# EAGLE board Power-Supply (EAGLE 9.6.2)
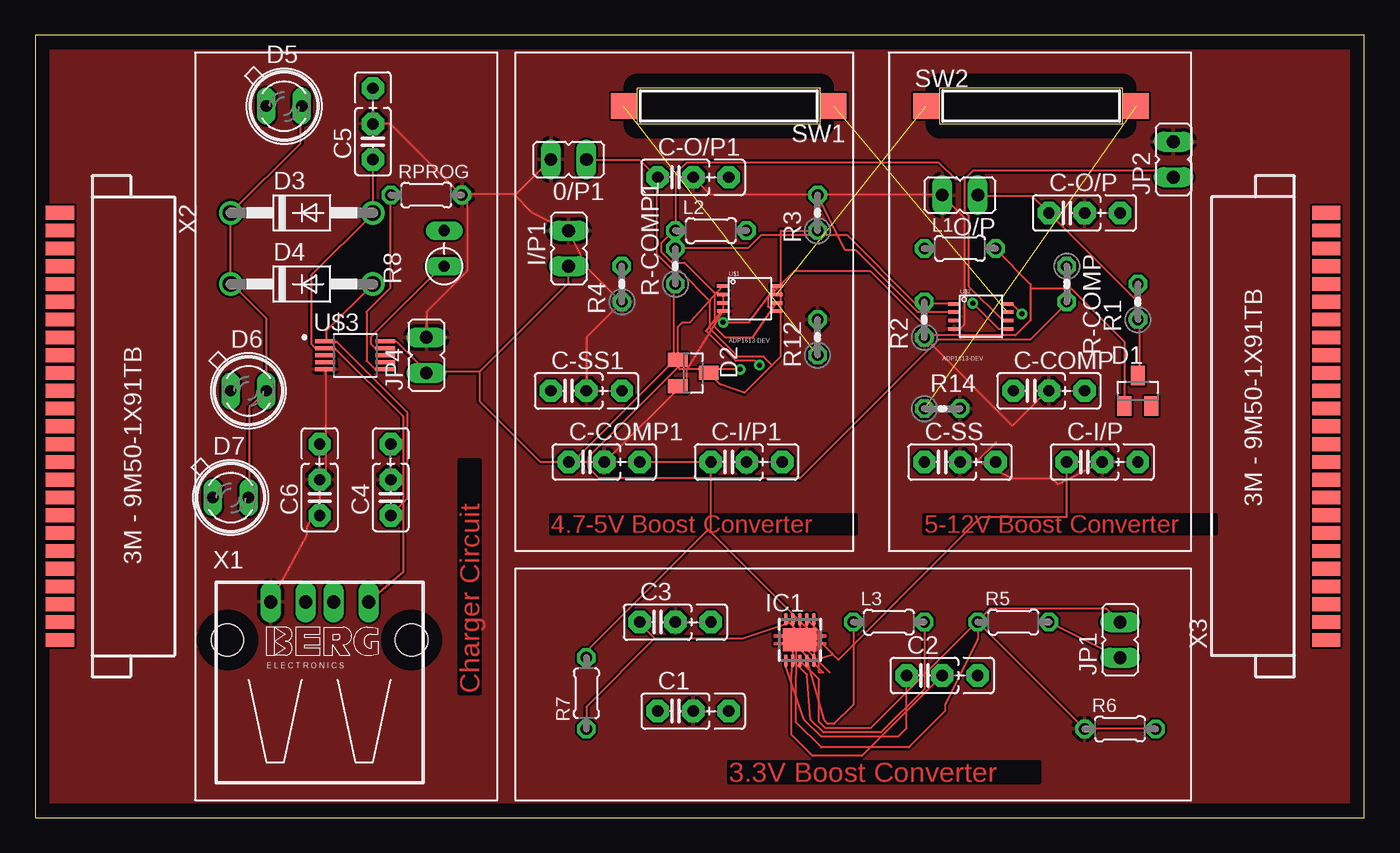
[diagram p0: board, top side]
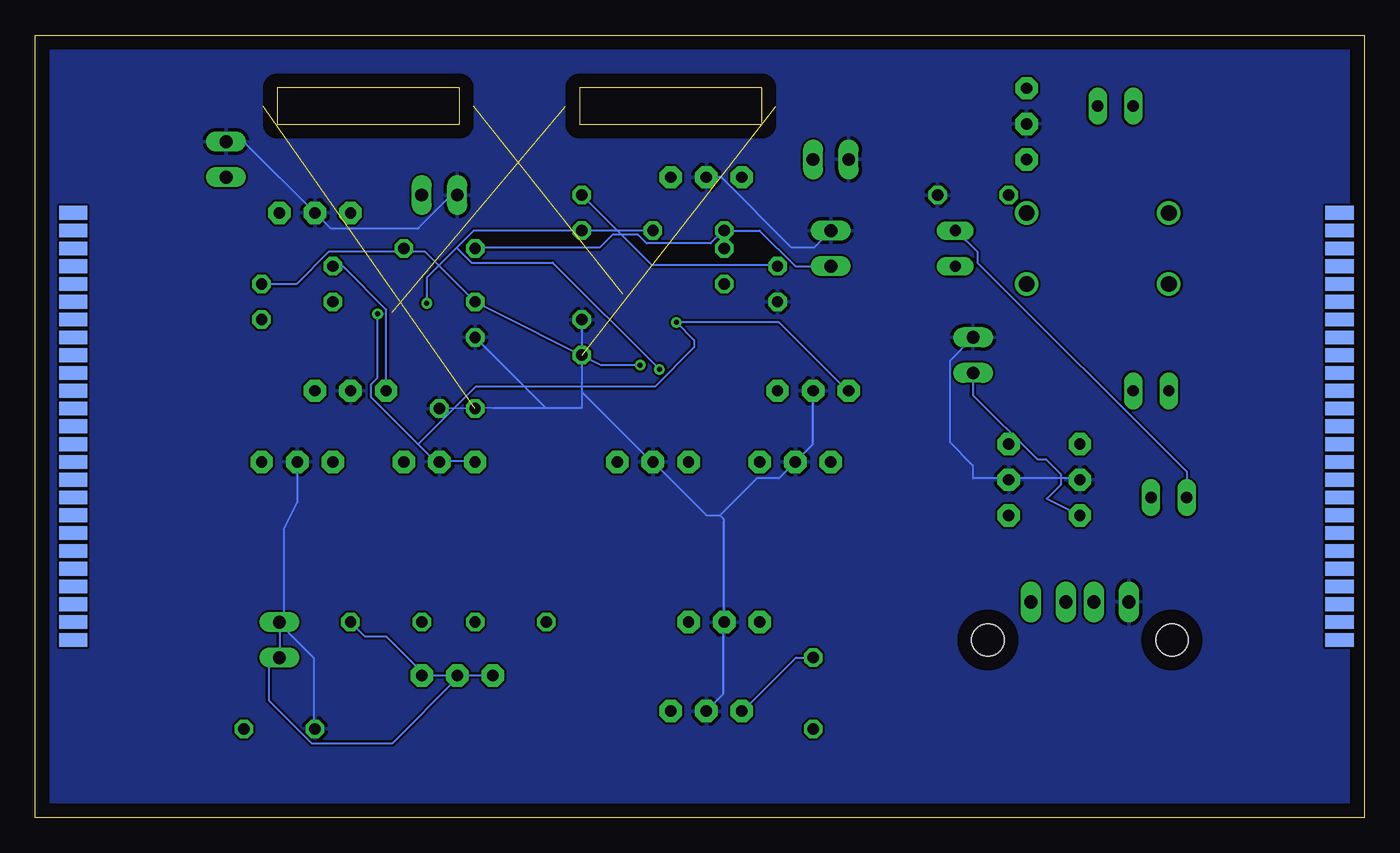
[diagram p1: board, bottom side, seen from below]

Size 94.92 x 55.87 mm. Coordinates in mm from the lower left corner, seen from the top.
Outline: 0,0 94.92,0 94.92,55.87 0,55.87 0,0
Copper layers (1*16): Top 0.035mm / dielectric 1.5mm / Bottom 0.035mm
Design rules "default": minimum track width 6mil, minimum drill 0.35mm, track to track 6mil, track to pad 6mil, pad to pad 6mil, via to via 6mil, smd to smd 6mil, copper to edge 40mil, drill to drill 6mil, minimum pad ring 10mil, minimum via ring 8mil, stop-mask expansion 4mil, vias tented up to drill 0mil, thermal gap 10mil

## Footprints (pad centres in the part's own frame; a part is rotated, then mirrored left to right if it is on the bottom)
JP1 = drill 0.914 long: 1 0,-1.27; 2 0,1.27
C2.5/5-2 = drill 0.813 pad 1.6 octagon: 1 -1.27,0; 2 1.27,0; 3 3.81,0
SOT23 = smd 1 x 1.4: 1 -0.95,-1.1; 2 0.95,-1.1; 3 0,1.1
DO41-10 = drill 1.118: A 5.08,0; C -5.08,0
SFH482 = drill 0.813 long: A -1.27,0; K 1.27,0
DRC-S-PVSON-N10 = smd 0.28 x 0.85: 1 -1,-1.475; 2 -0.5,-1.475; 3 0,-1.475; 4 0.5,-1.475; 5 1,-1.475; 6 1,1.475; 7 0.5,1.475; 8 0,1.475; 9 -0.5,1.475; 10 -1,1.475 | smd 2.4 x 1.65: TH 0,0
0204/5 = drill 0.813 octagon: 1 -2.54,0; 2 2.54,0
0204V = drill 0.813 octagon: 1 -1.27,0; 2 1.27,0
RS-2,5 = drill 0.813 long: 1 -1.27,0; 2 1.27,0
CT10-XXXX-A2 = smd 1.8 x 1.8: 1 -7.5,0; 2 7.5,0
ADP1613-FOOTPRINT = smd 0.85 x 0.25: P$1 -0.4,2.4; P$2 -0.4,1.8; P$3 -0.4,1.2; P$4 -0.4,0.6; P$5 3.4,0.6; P$6 3.4,1.2; P$7 3.4,1.8; P$8 3.4,2.4
SOP50P490X110-10N = smd 1.47 x 0.28: 1 -2.15,1; 2 -2.15,0.5; 3 -2.15,0; 4 -2.15,-0.5; 5 -2.15,-1; 6 2.15,-1; 7 2.15,-0.5; 8 2.15,0; 9 2.15,0.5; 10 2.15,1
PN87520 = drill 0.95 long: 1 -3.5,2.71; 2 -1,2.71; 3 1,2.71; 4 3.5,2.71 | hole 2.3: -6.57,0; 6.57,0
9M501X91 = smd 0.98 x 2.03: 1 -15.24,-3.29; 2 -13.97,-3.29; 3 -12.7,-3.29; 4 -11.43,-3.29; 5 -10.16,-3.29; 6 -8.89,-3.29; 7 -7.62,-3.29; 8 -6.35,-3.29; 9 -5.08,-3.29; 10 -3.81,-3.29; 11 -2.54,-3.29; 12 -1.27,-3.29; 13 0,-3.29; 14 1.27,-3.29; 15 2.54,-3.29; 16 3.81,-3.29; 17 5.08,-3.29; 18 6.35,-3.29; 19 7.62,-3.29; 20 8.89,-3.29; 21 10.16,-3.29; 22 11.43,-3.29; 23 12.7,-3.29; 24 13.97,-3.29; 25 15.24,-3.29 | smd 0.98 x 2.03 bottom: 26 -15.24,-3.29; 27 -13.97,-3.29; 28 -12.7,-3.29; 29 -11.43,-3.29; 30 -10.16,-3.29; 31 -8.89,-3.29; 32 -7.62,-3.29; 33 -6.35,-3.29; 34 -5.08,-3.29; 35 -3.81,-3.29; 36 -2.54,-3.29; 37 -1.27,-3.29; 38 0,-3.29; 39 1.27,-3.29; 40 2.54,-3.29; 41 3.81,-3.29; 42 5.08,-3.29; 43 6.35,-3.29; 44 7.62,-3.29; 45 8.89,-3.29; 46 10.16,-3.29; 47 11.43,-3.29; 48 12.7,-3.29; 49 13.97,-3.29; 50 15.24,-3.29

## Placement (x,y rotation side)
0/P1  5V  [JP1]  38.1,46.99 90 top
C1  10uF  [C2.5/5-2]  45.72,7.62 0 top
C2  10uF  [C2.5/5-2]  63.5,10.16 0 top
C3  0.1uF  [C2.5/5-2]  44.45,13.97 0 top
C4  4.7uF  [C2.5/5-2]  25.4,22.86 90 top
C5  4.7uF  [C2.5/5-2]  24.13,48.26 90 top
C6  4.7uF  [C2.5/5-2]  20.32,22.86 90 top
C-COMP  [C2.5/5-2]  71.12,30.48 0 top
C-COMP1  3300pF  [C2.5/5-2]  39.37,25.4 0 top
C-I/P  10uF  [C2.5/5-2]  74.93,25.4 0 top
C-I/P1  10uF  [C2.5/5-2]  49.53,25.4 0 top
C-O/P  10uF  [C2.5/5-2]  73.66,43.18 0 top
C-O/P1  10uF  [C2.5/5-2]  45.72,45.72 0 top
C-SS  [C2.5/5-2]  64.77,25.4 0 top
C-SS1  [C2.5/5-2]  38.1,30.48 0 top
D1  BAS70  [SOT23]  78.74,30.48 0 top
D2  BAS70  [SOT23]  46.99,31.75 270 top
D3  1N4004  [DO41-10]  19.05,43.18 0 top
D4  1N4004  [DO41-10]  19.05,38.1 0 top
D5  SFH482  [SFH482]  17.78,50.8 0 top
D6  SFH482  [SFH482]  15.24,30.48 0 top
D7  SFH482  [SFH482]  13.97,22.86 0 top
I/P1  3.3V  [JP1]  38.1,40.64 0 top
IC1  TPS6300  [DRC-S-PVSON-N10]  54.61,12.7 0 top
JP1  3.3v  [JP1]  77.47,12.7 0 top
JP2  [JP1]  81.28,46.99 0 top
JP4  [JP1]  27.94,33.02 0 top
L1  5uH  [0204/5]  66.04,40.64 0 top
L2  6.6uH  [0204/5]  48.26,41.91 0 top
L3  2.2uH  [0204/5]  60.96,13.97 0 top
O/P  12V  [JP1]  66.04,44.45 90 top
R1  900k  [0204V]  78.74,36.83 90 top
R2  100k  [0204V]  63.5,35.56 90 top
R3  320K  [0204V]  55.88,43.18 90 top
R4  100k  [0204V]  41.91,38.1 90 top
R5  1.0M  [0204/5]  69.85,13.97 0 top
R6  178.5K  [0204/5]  77.47,6.35 0 top
R7  100R  [0204/5]  39.37,8.89 90 top
R8  THERMISTOR-2,5  [RS-2,5]  29.21,40.64 90 top
R12  [0204V]  55.88,34.29 90 top
R14  [0204V]  64.77,29.21 0 top
R-COMP  30k  [0204V]  73.66,38.1 270 top
R-COMP1  6.8k  [0204V]  45.72,39.37 90 top
RPROG  [0204/5]  27.94,44.45 0 top
SW1  CT10-XXXX-A2  [CT10-XXXX-A2]  49.53,50.8 180 top
SW2  CT10-XXXX-A2  [CT10-XXXX-A2]  71.12,50.8 0 top
U$1  ADP1613-DEV  [ADP1613-FOOTPRINT]  49.53,35.56 0 top
U$2  ADP1613-DEV  [ADP1613-FOOTPRINT]  66.04,34.29 0 top
U$3  MCP73837-FCI/UN  [SOP50P490X110-10N]  22.86,33.02 0 top
X1  [PN87520]  20.32,12.7 0 top
X2  9M501X91TB  [9M501X91]  5.08,27.94 270 top
X3  9M501X91TB  [9M501X91]  88.9,27.94 90 top

## Library data of the parts
0/P1 I/P1 JP1 JP2 JP4 O/P = jumper
C1-C6 C-COMP C-COMP1 C-I/P C-I/P1 C-O/P C-O/P1 C-SS C-SS1 = capacitor-wima
D1-D4 = diode
D5-D7 = led
IC1 = texas; MPN: TPS63000DRCTG4; OC_FARNELL: 1511852; OC_NEWARK: 59M7217
L1-L3 = rcl; SPICEPREFIX: L
R1-R7 R12 R14 R-COMP R-COMP1 RPROG = rcl; SPICEPREFIX: R
R8 = varistor
SW1 SW2 = switch-coto
U$1 U$2 = ADP1613-DEV
U$3 = MCP73837-FCI_UN; AVAILABILITY: Warning; DESCRIPTION: Charger IC Lithium Ion/Polymer 10-MSOP; MF: Microchip; MP: MCP73837-FCI/UN; PACKAGE: MSOP-10 Microchip; PRICE: None; PURCHASE-URL: https://pricing.snapeda.com/search/part/MCP73837-FCI/UN/?ref=eda
X1 = con-berg; OC_FARNELL: unknown; OC_NEWARK: unknown
X2 X3 = con-3m; OC_FARNELL: unknown; OC_NEWARK: unknown

## Nets
GND: 0/P1.2 C1.2 C3.2 C4.2 C5.2 C6.2 C-COMP1.2 C-COMP.2 C-I/P1.2 C-I/P.2 C-O/P1.2 C-O/P.2 C-SS1.2 C-SS.2 I/P1.2 JP2.2 JP4.2 O/P.2 R2.1 R4.1 R6.1 R12.2 R14.2 RPROG.2 U$1.P$4 U$2.P$4 U$3.5 X1.1
N$1: D1.1 L1.2 U$1.P$5
N$2: SW1.1 U$2.P$7
N$3: C1.1 C6.1 C-I/P1.1 C-I/P.1 I/P1.1 IC1.5 JP2.1 JP4.1 L1.1 L2.1 R7.2 U$1.P$6 U$2.P$6 U$3.10
N$4: C-COMP.1 R-COMP.1
N$5: R-COMP1.2 U$2.P$1
N$6: R-COMP.2 U$1.P$1
N$7: IC1.4 L3.1
N$8: C-COMP1.1 R-COMP1.1
N$9: IC1.2 L3.2
N$10: D2.1 L2.2 U$2.P$5
N$11: C2.1 IC1.1 JP1.1 R5.2
N$12: IC1.10 R5.1 R6.2
N$13: R12.1 SW1.2
N$14: C3.1 IC1.6 IC1.7 IC1.8 R7.1
N$15: SW2.1 U$1.P$7
N$16: U$3.3
N$17: U$3.4
N$18: U$3.8
N$19: D5.A
N$20: D3.C D4.C D5.K D6.K D7.K
N$21: D6.A
N$22: D7.A R8.2
N$23: C5.1 D3.A U$3.2 X1.4
N$24: RPROG.1 U$3.6
N$25: C4.1 D4.A U$3.1
N$26: R8.1 U$3.9
N$27: R14.1 SW2.2
N$28: C2.2 IC1.3 IC1.9 JP1.2
SS: C-SS1.1 C-SS.1 U$1.P$8 U$2.P$8
V-I/P: R3.2 R4.2 U$2.P$2
V-O/P: 0/P1.1 C-O/P1.1 D2.3 R3.1
VIN: R1.2 R2.2 U$1.P$2
VOP: C-O/P.1 D1.3 O/P.1 R1.1

## Tracks (layer width: path | path; a pad name or v marks a point on that pad's centre or on a via)
GND
  Top 0.152: 68.63,26.82 67.21,25.4 C-SS.2 67.36,25.4 69.7,24.23 72.59,24.23 73.02,23.81 C-I/P.2 | C-COMP.2 72.29,30.48 69.8,27.99 R2.1 | U$1.P$4 46.53,31.98 46.53,31.24 40.74,25.45 C-COMP1.2 | U$2.P$4 65.73,34.9 66.04,34.9 66.34,35.2 66.34,42.82 64.82,44.35 O/P.2 64.67,44.5 48.21,44.5 C-O/P1.2 | U$3.5 20.78,32 20.78,24.59 C6.2 20.32,22.55 19.41,20.73 19.41,20.17 X1.1 | 34.19,44.5 34.34,44.5 0/P1.2 | 34.19,44.5 30.84,44.5 | 30.84,44.5 30.53,44.5 RPROG.2 | JP4.2 27.94,36.12 30.84,39.01 30.84,44.5 | 30.84,44.5 RPROG.2 | C5.2 25.35,49.53 30.38,44.5 RPROG.2 | 34.19,44.5 35.46,43.23 I/P1.2 39.42,39.27 41.81,36.88 R4.1 39.37,34.29 C-SS1.2
  Bottom 0.152: R6.1 75.03,6.4 75.03,11.43 77.16,13.56 77.16,20.57 76.2,22.5 C-I/P.2 | 58.47,29.26 62.23,29.26 R14.2 | 58.47,29.26 55.88,29.26 R12.2 55.88,30.38 50.9,25.4 C-I/P1.2 46.99,21.59 46.02,21.59 | 58.47,29.26 R2.1 | C1.2 45.77,8.84 45.77,13.87 C3.2 45.77,14.02 45.77,21.34 46.02,21.59 | C-SS1.2 39.37,26.67 C-COMP1.2 41.81,24.23 43.38,24.23 46.02,21.59 | JP2.2 81.28,48.16 79.91,48.16 C-O/P.2 73.81,42.06 67.56,42.06 65.28,44.35 64.82,44.35 O/P.2 | 25.4,24.23 20.37,24.23 C6.2 | 25.4,24.23 27.94,24.23 27.94,25.15 29.62,26.82 29.62,32.61 JP4.2 | C-O/P1.2 45.92,45.72 40.89,40.69 39.32,40.69 I/P1.2 | 25.4,24.23 C4.2
  pour Top: -1.27,58.42 96.52,58.42 96.52,-1.27 -2.54,-1.27 -2.54,58.42
  pour Bottom: 101.6,60.96 101.6,-3.81 -3.81,-3.81 -3.81,60.96
N$1
  Top 0.152: 71.07,37.8 71.07,38.1 68.63,40.54 L1.2 | 71.07,37.8 71.07,35.51 70,34.44 64.21,34.44 59.64,39.01 54.2,39.01 52.32,37.14 52.32,36.51 U$1.P$5 | 71.07,37.8 73.96,37.8 77.77,33.98 77.77,29.51 D1.1
N$2  (1 unrouted)
N$3
  Top 0.152: 48.26,20.37 48.06,20.57 39.37,11.89 R7.2 | 48.26,20.37 56.9,11.73 56.99,11.64 | 56.99,11.64 IC1.5 | 48.26,20.37 C-I/P1.1 36.07,25.4 31.75,29.72 31.75,31.85 | C-I/P.1 73.66,21.49 67.56,21.49 57.35,11.28 56.99,11.64 | 66.34,45.57 66.34,43.28 66.65,42.98 66.65,37.95 69.09,35.51 69.39,35.51 U$2.P$6 | 66.34,45.57 66.95,46.18 80.82,46.18 JP2.1 | 27.94,31.85 25.81,33.98 25.04,33.98 U$3.10 | U$1.P$6 51.27,34.29 49.28,34.29 48.51,35.05 48.51,37.49 46.38,39.62 45.47,39.62 44.7,40.39 44.7,41 45.62,41.91 L2.1 45.77,41.91 45.77,46.03 46.53,46.79 64.52,46.79 65.73,45.57 66.34,45.57 | 31.75,31.85 27.94,31.85 | 31.75,31.85 38.1,38.2 I/P1.1 | 27.94,31.85 JP4.1
  Bottom 0.152: R7.2 40.59,11.43 44.4,7.62 C1.1 | JP4.1 27.94,30.18 23.37,25.6 22.76,25.6 21.69,24.54 21.69,23.77 22.69,22.77 C6.1 | L1.1 63.45,40.69 54.61,40.69 53.7,41.61 51.87,41.61 51.26,41 46.69,41 45.77,41.91 L2.1 43.18,41.91 40.64,39.37 I/P1.1
N$4
  Bottom 0.152: C-COMP.1 69.85,36.27 72.9,39.32 73.66,39.32 R-COMP.1
N$5
  Top 0.152: U$2.P$1 65.58,36.73 62.84,36.73 57.96,41.61 51.87,41.61 50.95,40.69 45.77,40.69 R-COMP1.2
N$6
  Top 0.152: U$1.P$1 46.77,35.36 46.23,35.36 45.92,35.05 45.92,32.16 39.52,25.76 39.52,24.99 40.28,24.23 54.61,24.23 64.52,34.14 71.07,34.14 73.66,36.73 R-COMP.2
N$7
  Top 0.152: L3.1 58.42,8.08 57.05,6.71 56.59,6.71 56.44,6.86 56.29,7.11 IC1.4
N$8
  Top 0.152: R-COMP1.1 45.62,38.1 45.62,32.61 38.46,25.45 38.15,25.45 C-COMP1.1
N$9
  Top 0.152: IC1.2 55.12,10.22 55.37,7.01 56.29,6.1 60.4,6.1 63.5,9.2 L3.2
N$10  (via drill 0.35)
  Top 0.152: v66.95,36.73 68.78,34.9 69.39,34.9 U$2.P$5 | v50.34,32 46.02,32 D2.1
  Bottom 0.152: v66.95,36.73 66.95,38.56 64.82,40.69 | 64.82,40.69 63.6,41.91 L2.2 | v50.34,32 57.96,39.62 63.75,39.62 64.82,40.69
N$11
  Top 0.152: JP1.1 R5.2 | IC1.1 53.57,10.87 54.91,7.01 56.13,5.79 61.62,5.79 62.23,6.4 C2.1
  Bottom 0.152: C2.1 67.06,10.16 69.85,12.95 71.37,12.95 R5.2
N$12
  Top 0.152: IC1.10 54.33,13.45 54.3,6.86 56.13,5.03 62.38,5.03 64.97,7.62 64.97,8.08 67.31,12.75 R5.1 74.88,6.4 79.91,6.4 R6.2
N$13  (1 unrouted)
N$14
  Top 0.152: 56.74,10.36 55.65,11.46 | 55.65,11.46 IC1.6 | 55.65,11.46 55.18,11.93 IC1.7 55.92,13.36 55.98,10.36 56.29,10.36 54.61,12.04 IC1.8 50.54,12.8 44.25,12.8 | 44.25,12.8 43.18,13.87 C3.1 | R7.1 39.37,7.92 44.25,12.8
N$15  (1 unrouted)
N$20
  Top 0.152: D7.K 15.29,22.86 15.29,29.26 D6.K 16.51,35.66 14.07,38.1 D4.C 13.92,38.1 13.92,43.13 D3.C 18.95,48.16 18.95,50.75 D5.K
N$22
  Bottom 0.152: D7.A 12.7,24.69 27.64,39.62 27.64,40.39 29.16,41.91 R8.2
N$23
  Top 0.152: X1.4 26.26,17.54 26.26,28.65 21.39,33.53 20.78,33.53 U$3.2 20.62,33.53 20.02,33.53 19.71,33.83 19.71,38.71 24.13,43.13 D3.A C5.1
N$24
  Top 0.152: U$3.6 24.89,32 24.28,32 23.67,32.61 23.67,36.12 25.35,37.8 25.35,44.35 RPROG.1
N$25
  Top 0.152: D4.A 20.78,34.75 20.78,34.14 U$3.1 20.78,33.98 21.54,33.98 26.57,28.96 26.57,22.76 C4.1
N$26
  Top 0.152: U$3.9 24.89,33.53 24.28,33.53 23.98,33.83 23.98,34.29 29.16,39.47 R8.1
N$27  (1 unrouted)
N$28
  Top 0.152: C2.2 59.03,4.42 55.52,4.42 54,5.94 54,10.36 54.11,12.43 IC1.9 | JP1.2 76.5,14.93 68.17,14.93 59.64,6.4 56.44,6.4 55.98,6.86 55.98,9.88 IC1.3
  Bottom 0.152: C2.2 64.77,9.96 69.39,5.33 75.18,5.33 78.23,8.38 78.23,10.97 77.47,11.35 JP1.2
SS  (via drill 0.35)
  Top 0.152: v70.46,35.97 69.85,36.58 69.54,36.58 U$2.P$8 | v49.12,35.36 50.99,35.36 U$1.P$8
  Bottom 0.152: v70.46,35.97 70.46,31.39 70.92,30.94 70.92,30.02 67.56,26.67 | 67.56,26.67 66.34,25.45 63.5,25.45 C-SS.1 | C-SS1.1 36.93,30.48 41.81,35.36 v49.12,35.36 47.85,34.09 47.85,33.58 50.65,30.79 63.45,30.79 67.56,26.67
V-I/P
  Top 0.152: U$2.P$2 65.58,36.12 62.99,36.12 58.57,40.54 57.84,40.54 R3.2
  Bottom 0.152: R3.2 50.9,39.47 41.96,39.47 R4.2
V-O/P
  Top 0.152: 44.4,45.72 43.18,46.94 39.37,46.94 0/P1.1 | 52.63,32.31 53.24,32.92 53.24,41.91 R3.1 | 52.63,32.31 50.65,30.33 48.91,30.93 D2.3 | 44.4,45.72 44.4,40.23 45.62,39.01 46.08,39.01 48.21,36.88 48.21,34.9 50.19,32.92 52.02,32.92 52.63,32.31 | 44.4,45.72 C-O/P1.1
VIN  (via drill 0.35)
  Top 0.152: v51.71,32.31 51.41,32.61 50.04,32.61 47.9,34.75 49.13,36.35 U$1.P$2
  Bottom 0.152: v51.71,32.31 54.46,32.31 R2.2 67.06,40.39 73.96,40.39 76.25,38.1 R1.2
VOP
  Top 0.152: D1.3 78.84,31.65 78.84,35.51 R1.1 78.69,35.66 78.69,36.88 C-O/P.1 71.22,44.35 67.41,44.35 O/P.1

## Text on the board
Top: 4.7-5V Boost Converter | 5-12V Boost Converter | Charger Circuit | 3.3V Boost Converter